# EAGLE board Sensor (EAGLE 6.6.0)
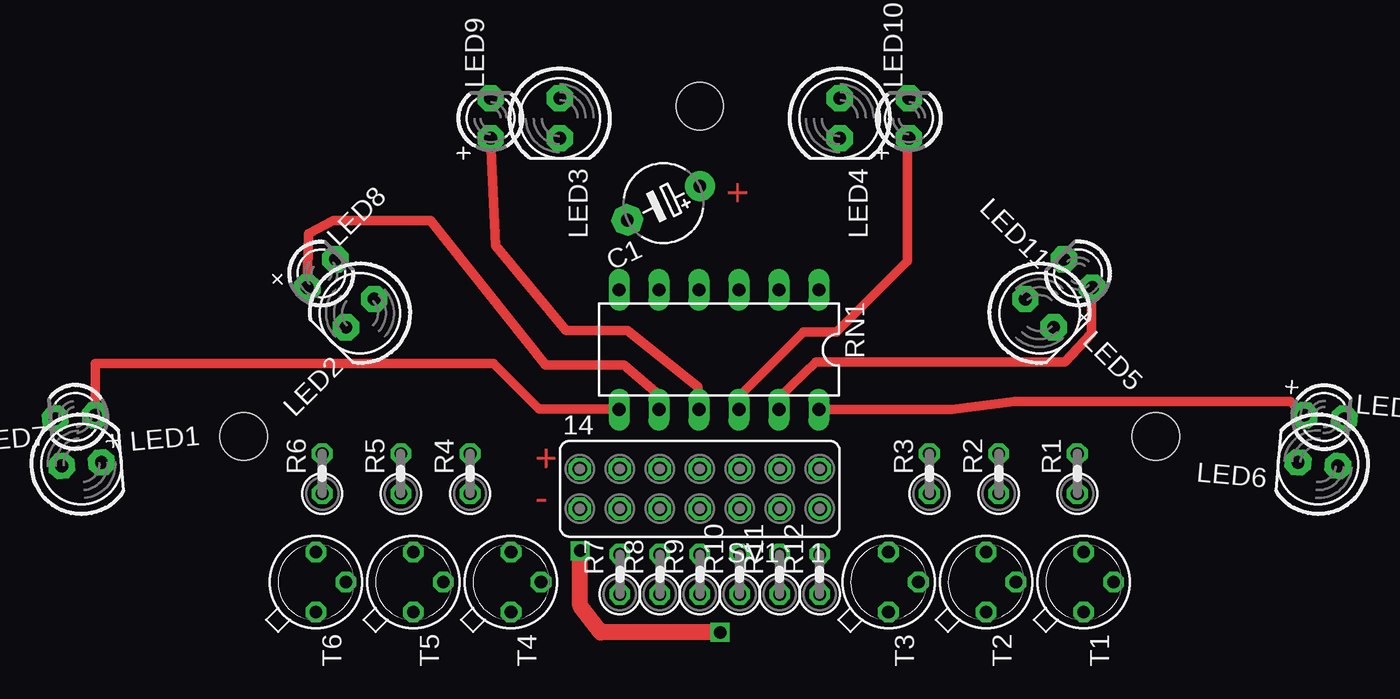
[diagram p0: board, top side]
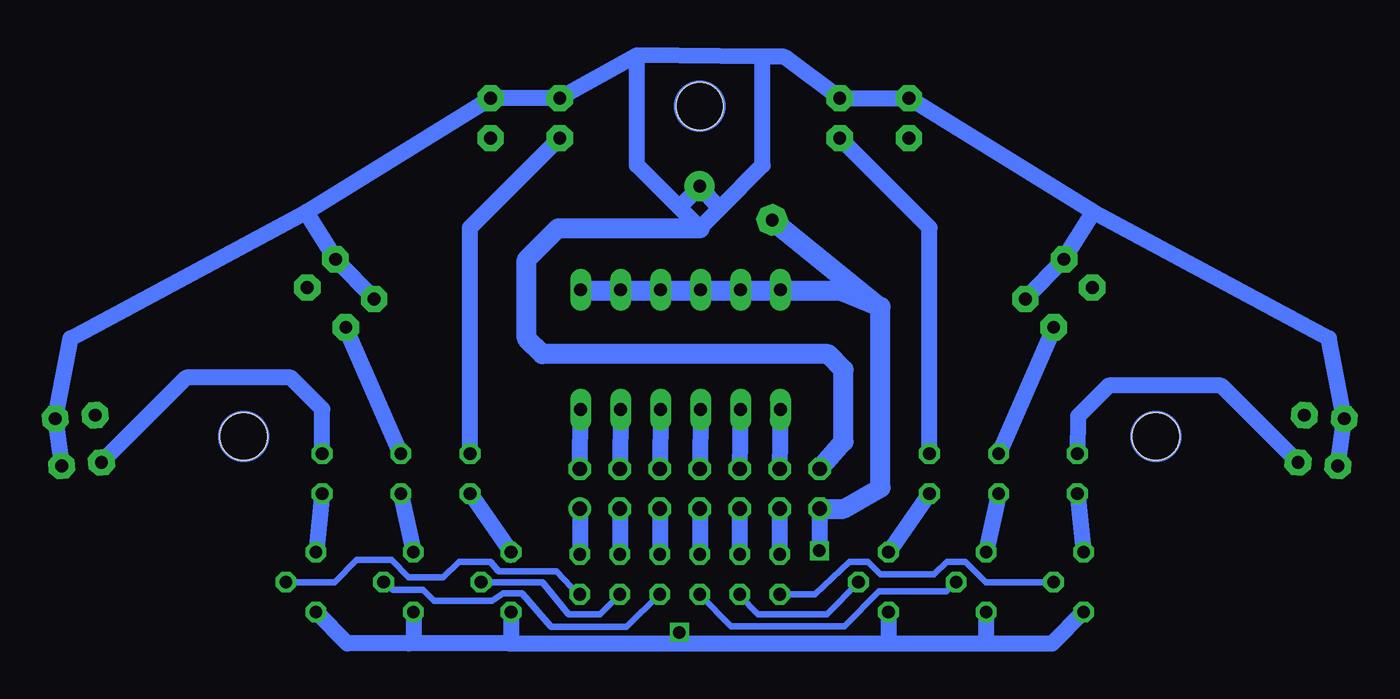
[diagram p1: board, bottom side, seen from below]

No outline drawn. Coordinates in mm, seen from the top.
Copper layers (1*16): Top 0.035mm / dielectric 1.5mm / Bottom 0.035mm
Design rules "default": minimum track width 10mil, minimum drill 24mil, track to track 8mil, track to pad 8mil, pad to pad 8mil, via to via 8mil, smd to smd 8mil, copper to edge 40mil, drill to drill 8mil, minimum pad ring 10mil, minimum via ring 8mil, stop-mask expansion 4mil, vias tented up to drill 0mil, thermal gap 10mil
Holes 3 mm at -29,13.76 29,13.76 0,34.76

## Footprints (pad centres in the part's own frame; a part is rotated, then mirrored left to right if it is on the bottom)
E5-5 = drill 0.813 pad 1.905: + -2.54,0 | drill 0.813 pad 1.905 octagon: - 2.54,0
LED5MM = drill 0.813 pad 1.676 octagon: A -1.27,0; K 1.27,0
LED3MM = drill 0.813 pad 1.676 octagon: A -1.27,0; K 1.27,0
0207/2V = drill 0.813 octagon: 1 -1.27,0; 2 1.27,0
DIL14 = drill 0.813 long: 1 -7.62,-3.81; 2 -5.08,-3.81; 3 -2.54,-3.81; 4 0,-3.81; 5 2.54,-3.81; 6 5.08,-3.81; 9 5.08,3.81; 10 2.54,3.81; 11 0,3.81; 12 -2.54,3.81; 13 -5.08,3.81; 14 -7.62,3.81
FE07-2 = drill 0.914: 1 -7.62,1.27 | drill 0.914 octagon: 2 -7.62,-1.27; 3 -5.08,1.27; 4 -5.08,-1.27; 5 -2.54,1.27; 6 -2.54,-1.27; 7 0,1.27; 8 0,-1.27; 9 2.54,1.27; 10 2.54,-1.27; 11 5.08,1.27; 12 5.08,-1.27; 13 7.62,1.27; 14 7.62,-1.27
TO18- = drill 0.813 octagon: 1 1.905,0; 2 0,1.905; 3 -1.905,0

## Placement (x,y rotation side)
C1  33uF  [E5-5]  -2.3,28.6 205 top
LED1  SFH485P  [LED5MM]  -39.3,12 5 top
LED2  SFH485P  [LED5MM]  -21.6,21.6 225 top
LED3  SFH485P  [LED5MM]  -8.9,34 270 top
LED4  SFH485P  [LED5MM]  8.9,34 270 top
LED5  SFH485P  [LED5MM]  21.6,21.6 315 top
LED6  SFH485P  [LED5MM]  39.3,12 175 top
LED7  QSD2030F  [LED3MM]  -39.7,15 185 top
LED8  QSD2030F  [LED3MM]  -24.05,24.13 45 top
LED9  QSD2030F  [LED3MM]  -13.3,34 90 top
LED10  QSD2030F  [LED3MM]  13.3,34 90 top
LED11  QSD2030F  [LED3MM]  24.05,24.13 135 top
LED12  QSD2030F  [LED3MM]  39.7,15 355 top
R1  36  [0207/2V]  24,11.4 90 top
R2  36  [0207/2V]  19,11.4 90 top
R3  36  [0207/2V]  14.6,11.4 90 top
R4  36  [0207/2V]  -14.6,11.4 90 top
R5  36  [0207/2V]  -19,11.4 90 top
R6  36  [0207/2V]  -24,11.4 90 top
R7  820  [0207/2V]  -5.08,5 90 top
R8  820  [0207/2V]  -2.54,5 90 top
R9  820  [0207/2V]  0,5 90 top
R10  820  [0207/2V]  2.54,5 90 top
R11  820  [0207/2V]  5.08,5 90 top
R12  820  [0207/2V]  7.62,5 90 top
RN1  [DIL14]  -0.05,19.28 180 top
SV1  T821114A1S100CEU  [FE07-2]  0,10.43 180 top
T1  BC108  [TO18-]  24.4,4.5 270 top
T2  BC108  [TO18-]  18.2,4.5 270 top
T3  BC108  [TO18-]  12,4.5 270 top
T4  BC108  [TO18-]  -12,4.5 270 top
T5  BC108  [TO18-]  -18.2,4.5 270 top
T6  BC108  [TO18-]  -24.4,4.5 270 top

## Library data of the parts
C1 LED1-LED12 = adafruit
R1-R12 = resistor
RN1 = GFL_Micromouse; OC_FARNELL: unknown; OC_NEWARK: unknown
SV1 = con-lsta; OC_FARNELL: unknown; OC_NEWARK: unknown
T1-T6 = transistor

## Nets
+5V: C1.+ LED1.A LED2.A LED3.A LED4.A LED5.A LED6.A LED7.K LED8.K LED9.K LED10.K LED11.K LED12.K SV1.14
GND: C1.- RN1.1 RN1.2 RN1.3 RN1.4 RN1.5 RN1.6 SV1.13 T1.1 T2.1 T3.1 T4.1 T5.1 T6.1
I1: R12.2 SV1.1
I2: R11.2 SV1.3
I3: R10.2 SV1.5
I4: R9.2 SV1.7
I5: R8.2 SV1.9
I6: R7.2 SV1.11
N$1: LED6.K R1.2
N$2: LED5.K R2.2
N$3: LED4.K R3.2
N$4: LED3.K R4.2
N$5: LED2.K R5.2
N$6: LED1.K R6.2
N$7: R1.1 T1.3
N$8: R2.1 T2.3
N$9: R3.1 T3.3
N$10: R4.1 T4.3
N$11: R5.1 T5.3
N$12: R6.1 T6.3
N$13: R7.1 T6.2
N$14: R9.1 T5.2
N$15: R8.1 T4.2
N$16: R10.1 T2.2
N$17: R11.1 T3.2
N$18: R12.1 T1.2
O1: LED7.A RN1.9 SV1.12
O2: LED8.A RN1.10 SV1.10
O3: LED9.A RN1.11 SV1.8
O4: LED10.A RN1.12 SV1.6
O5: LED11.A RN1.13 SV1.4
O6: LED12.A RN1.14 SV1.2

## Tracks (layer width: path | path; a pad name or v marks a point on that pad's centre or on a via)
+5V
  Bottom 1.016: LED1.A LED7.K -40,20 -25.02,28.04 | LED2.A LED8.K -25.02,28.04 | LED5.A LED11.K 25.02,28.04 | LED6.A LED12.K 40,20 25.02,28.04 | -4,37.9 -5.38,37.9 LED3.A LED9.K -25.02,28.04 | 25.02,28.04 LED10.K LED4.A 4,38 | -1.25,28.25 0,27 4,31 4,38 | -1.25,28.25 -4,31 -4,37.9 | -1.25,28.25 C1.+ 1.2,28.4 | -4,37.9 4,38
  Bottom 1.27: SV1.14 -9.15,13.43 -9.15,18 -8.15,19 10,19 11,20 11,25 9,27 0,27
GND  (via drill 0.8)
  Top 0.813: v-7.6,6.5 -7.5,6.5 -7.6,6.4
  Top 1.016: -7.6,6.4 v-7.6,6.5 -7.6,3 -6.3,1.3 v1.3,1.3
  Bottom 1.016: 12.1,0.6 1.3,0.6 | 1.3,0.6 -11.7,0.6 | -11.7,0.6 -18,0.6 | -18,0.6 -22.41,0.6 T6.1 | T5.1 -18.2,0.8 -18,0.6 | T4.1 -12,0.9 -11.7,0.6 | 12.1,0.6 18.5,0.6 | 18.5,0.6 22.41,0.6 T1.1 | T2.1 18.2,0.9 18.5,0.6 | T3.1 12,0.7 12.1,0.6 | -11.5,22 -11.33,22.07 | 7.48,23 RN1.1 RN1.2 RN1.3 RN1.4 RN1.5 RN1.6 | 1.3,0.6 v1.3,1.3 | SV1.13 -7.62,6.72 -7.6,6.7 v-7.6,6.5 SV1.13
  Bottom 1.27: SV1.13 -9.16,9.16 -11.5,10.5 -11.5,22 | 7.48,23 -9,23 -11.33,22.07 C1.-
I1
  Bottom 1.016: SV1.1 R12.2
I2
  Bottom 1.016: SV1.3 R11.2
I3
  Bottom 1.016: SV1.5 R10.2
I4
  Bottom 1.016: SV1.7 R9.2
I5
  Bottom 1.016: SV1.9 R8.2
I6
  Bottom 1.016: SV1.11 R7.2
N$1
  Bottom 1.016: R1.2 24,15.5 26,17.5 32.65,17.5 LED6.K
N$2
  Bottom 1.016: R2.2 LED5.K
N$3
  Bottom 1.016: R3.2 14.6,27.03 LED4.K
N$4
  Bottom 1.016: R4.2 -14.6,27.03 LED3.K
N$5
  Bottom 1.016: LED2.K R5.2
N$6
  Bottom 1.016: LED1.K -33.15,17 -26,17 -24.04,15.04 R6.2
N$7
  Bottom 1.016: R1.1 T1.3
N$8
  Bottom 0.813: 18.3,6.5 T2.3
  Bottom 1.016: R2.1 T2.3
N$9
  Bottom 0.813: T3.3 12,6.11
  Bottom 1.016: R3.1 T3.3
N$10
  Bottom 1.016: R4.1 T4.3
N$11
  Bottom 0.813: -18.2,6.49 T5.3
  Bottom 1.016: R5.1 T5.3
N$12
  Bottom 0.813: -24.4,6.53 T6.3
  Bottom 1.016: R6.1 -24.4,6.53
N$13
  Bottom 0.406: R7.1 -7.33,3.73 -9.5,5.8 -10.7,5.8 -11.5,5 -14.9,5 -15.7,5.8 -16.9,5.8 -18.2,4.5 T6.2
N$14
  Bottom 0.406: 0,3.7 -2,1.7 -9.2,1.7 -11.4,3.9 -15.7,3.9 T5.2
  Bottom 0.61: R9.1 0,3.7
N$15
  Bottom 0.406: -2.54,3.66 -3.7,2.45 -8.1,2.45 T4.2
  Bottom 0.61: R8.1 -2.54,3.66
N$16
  Bottom 0.406: 2.57,3.73 4.65,1.65 9.45,1.65 11.3,3.8 12.5,3.8 13.2,3.3 16.9,3.3 17.6,4 19.5,4 T2.2
  Bottom 0.61: R10.1 2.57,3.73
N$17
  Bottom 0.406: R11.1 6.35,2.45 8.35,2.45 10,4.5 T3.2
  Bottom 0.61: R11.1
N$18
  Bottom 0.406: 7.73,3.73 9.1,5.2 12.8,5.2 13.3,5.8 15.3,5.8 16.3,4.8 18.5,4.8 19.6,5.9 21.8,5.9 23.2,4.5 T1.2
  Bottom 0.61: R12.1 7.73,3.73
O1
  Top 0.61: LED7.A -38.42,18.4 -13.1,18.4 -10.2,15.5 -5.16,15.5 RN1.9
  Bottom 1.016: RN1.9 SV1.12
O2
  Top 0.61: RN1.10 -2.59,16.39 -4.8,18.3 -9.8,18.3 -17.1,27.5 -23.3,27.5 -24.85,26.65 LED8.A
  Bottom 1.016: RN1.10 SV1.10
O3
  Top 0.61: RN1.11 -0.1,15.52 -0.1,16.9 -4.6,20.5 -8.5,20.5 -12.99,25.89 LED9.A
  Bottom 1.016: RN1.11 SV1.8
O4
  Top 0.61: RN1.12 2.49,16.29 6.6,20.4 8.7,20.4 13.2,24.9 13.2,31.72 LED10.A
  Bottom 1.016: RN1.12 SV1.6
O5
  Top 0.61: RN1.13 5.03,16.23 7.4,18.5 23.2,18.5 24.9,20.3 24.9,23.18 LED11.A
  Bottom 1.016: RN1.13 SV1.4
O6
  Top 0.61: RN1.14 16.03,15.47 20,16 27,16 37.55,16 LED12.A
  Bottom 1.016: SV1.2 RN1.14
(copper drawn outside any net)
  shapes: Bottom circle x3

## Text on the board
Top: + | + | -